# EAGLE board Huzzah-Motor-Driver-v1 (EAGLE 7.5.0)
REV: A

No outline drawn. Coordinates in mm, seen from the top.
Copper layers (1*16): Top 0.035mm / dielectric 1.5mm / Bottom 0.035mm
Design rules "adafruit *": minimum track width 10mil, minimum drill 15.5mil, track to track 8mil, track to pad 8mil, pad to pad 8mil, via to via 8mil, smd to smd 8mil, copper to edge 10mil, drill to drill 8mil, minimum pad ring 10mil, minimum via ring 8mil, stop-mask expansion 2mil, vias tented up to drill 20mil, thermal gap 10mil

## Footprints (pad centres in the part's own frame; a part is rotated, then mirrored left to right if it is on the bottom)
1X06_ROUND_70 = drill 1 pad 1.778: 1 -6.35,0; 2 -3.81,0; 3 -1.27,0; 4 1.27,0; 5 3.81,0; 6 6.35,0
1X10_ROUND70 = drill 1 pad 1.778: 1 -11.43,0; 2 -8.89,0; 3 -6.35,0; 4 -3.81,0; 5 -1.27,0; 6 1.27,0; 7 3.81,0; 8 6.35,0; 9 8.89,0; 10 11.43,0

## Placement (x,y rotation side)
JP1  FTDI  [1X06_ROUND_70]  12.7,2.03 0 top
JP4  [1X10_ROUND70]  2.54,20.32 270 top
JP5  [1X10_ROUND70]  22.86,20.32 90 top
U$2  [HUZZAHLOGO]  21.59,30.61 0 bottom
U$12  [ADAFRUIT_TEXT_20MM]  22.61,4.7 0 bottom
U$13  [PCBFEAT-REV-040]  20.07,5.08 0 bottom

## Library data of the parts
JP1 JP4 JP5 U$2 U$12 U$13 = microbuilder

## Nets
3.3V: JP5.3
ADC: JP4.2
CH_PD: JP4.3
GND: JP1.6 JP4.10 JP5.1
GPIO0: JP5.6
GPIO2: JP5.5
GPIO4: JP5.7
GPIO5: JP5.8
GPIO12: JP4.6
GPIO13: JP4.7
GPIO14: JP4.5
GPIO15: JP5.4
GPIO16: JP4.4
LDO_EN: JP5.2
RESET_5V: JP4.1
RXD_5V: JP1.3 JP5.9
TXD: JP1.2 JP5.10
VBAT: JP4.9
VIN: JP1.4 JP4.8

## Tracks (layer width: path | path; a pad name or v marks a point on that pad's centre or on a via)
GND  (2 unrouted)
RXD_5V  (1 unrouted)
TXD  (1 unrouted)
VIN  (1 unrouted)

## Text on the board
tPlace: RST | TX | A | RX | EN | #5 | 16 | #4 | 14 | #0 | 12 | #2 | 13 | 15 | V+ | 3V | VBat | LDO | TX | RX | V+ | GND